# Altium PCB felxBoard.PcbDoc
Units mm, origin at the board's own origin, x right, y up, seen from the top; angles counter-clockwise.
Board outline 180 x 37.5 mm, 2 copper layers (Top Layer, Bottom Layer), stack 0.475 mm thick; 55 components, 32 nets, 176 pads, 79 vias.
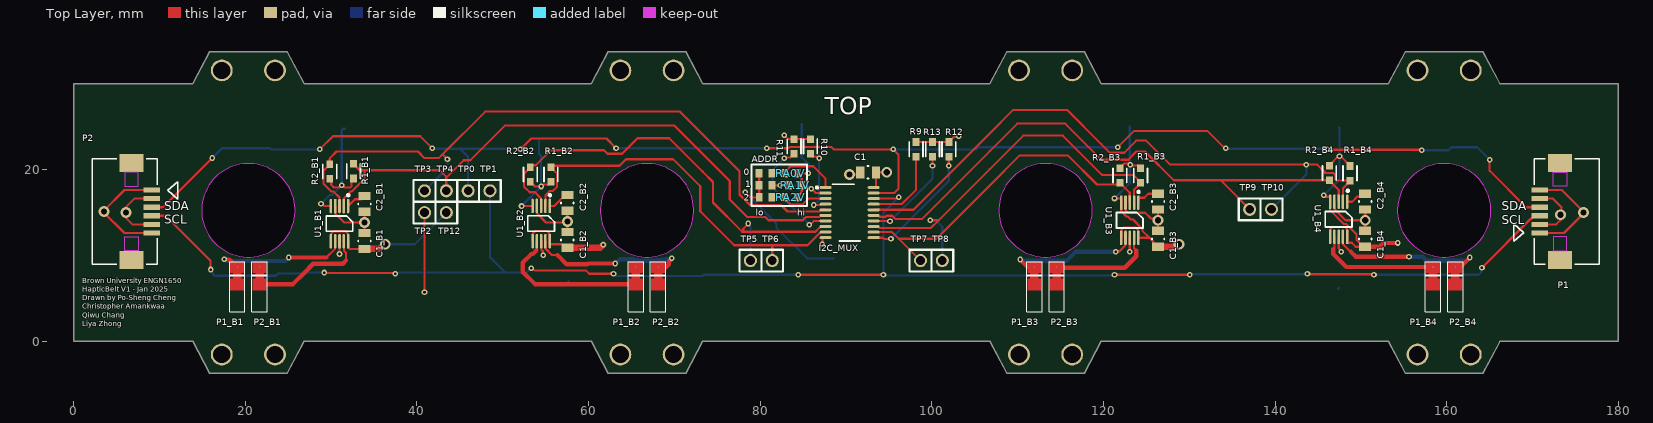
[diagram p0: Top Layer view]
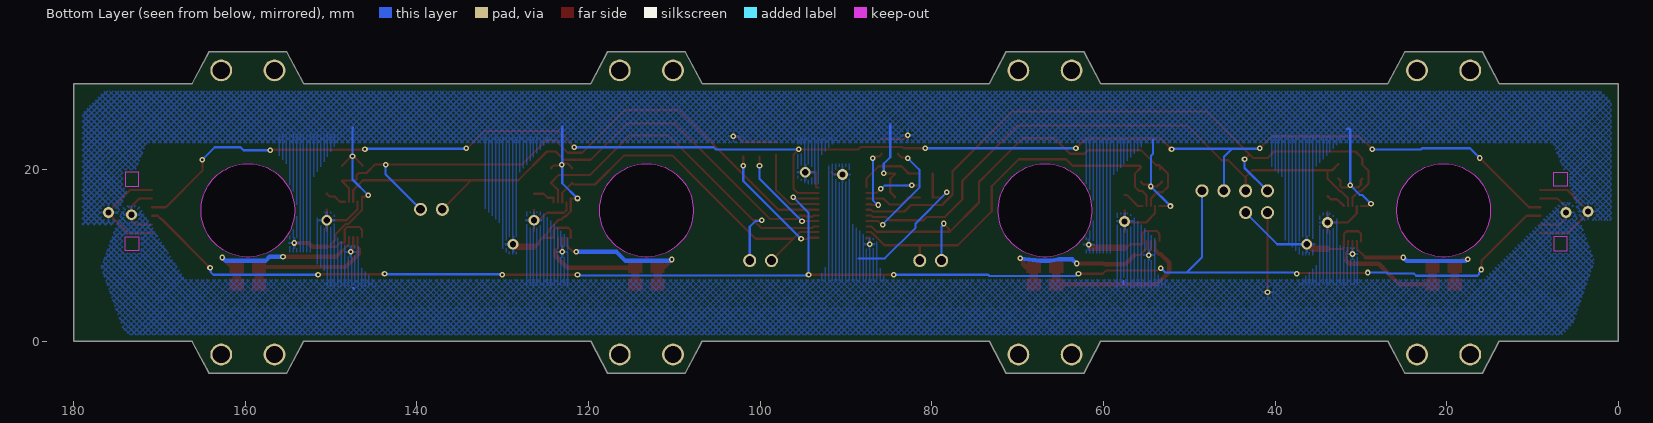
[diagram p1: Bottom Layer view, seen from below]
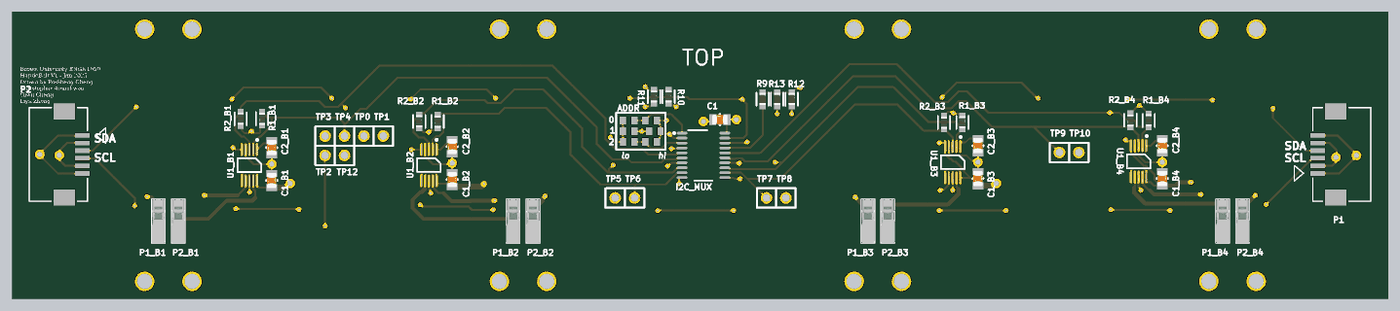
[diagram p2: 3D render of the assembled board from above, using the file's embedded part models]

## Layer stack, top to bottom
Top Solder: solder mask 0.0102, Solder Resist, Dk 3.5
Top Layer: signal copper 0.012
Dielectric 1: prepreg 0.0508, PP-001, Dk 3.9
Stiffener: core 0.4, Core-009, Dk 4.5
Bottom Layer: signal copper 0.012
Bottom Solder: solder mask 0.0102, Solder Resist, Dk 3.5

## Board outline
153.191,0 155.191,-3.748 164.191,-3.748 166.191,-0.008 180,0 180,30 166.191,30 164.191,33.752 155.191,33.752 153.191,30 119.752,30 117.752,33.752 108.752,33.752 106.752,30 73.312,30 71.312,33.752 62.312,33.752 60.312,30 26.872,30 24.872,33.752 15.872,33.752 13.872,30 0,30 0,0 13.872,0 15.872,-3.748 24.872,-3.748 26.872,0 60.312,0 62.312,-3.748 71.312,-3.748 73.312,0 106.752,0 108.752,-3.748 117.752,-3.748 119.752,0
cut-out: 109.402,11.402 ccw(c113.252,15.252) 117.102,11.402 ccw(c113.252,15.252) 117.102,19.102 ccw(c113.252,15.252) 109.402,19.102 ccw(c113.252,15.252)
cut-out: 62.962,11.402 ccw(c66.812,15.252) 70.662,11.402 ccw(c66.812,15.252) 70.662,19.102 ccw(c66.812,15.252) 62.962,19.102 ccw(c66.812,15.252)
cut-out: 16.522,11.402 ccw(c20.372,15.252) 24.222,11.402 ccw(c20.372,15.252) 24.222,19.102 ccw(c20.372,15.252) 16.522,19.102 ccw(c20.372,15.252)
cut-out: 155.841,11.402 ccw(c159.691,15.252) 163.541,11.402 ccw(c159.691,15.252) 163.541,19.102 ccw(c159.691,15.252) 155.841,19.102 ccw(c159.691,15.252)
board region P2: 13.872,0 0,0 0,30 13.872,30
board region B1: 26.872,0 24.872,-3.748 15.872,-3.748 13.872,0 13.872,30 15.872,33.752 24.872,33.752 26.872,30
board region "Flex 1": 60.312,0 26.872,0 26.872,30 60.312,30
board region B2: 73.312,0 71.312,-3.748 62.312,-3.748 60.312,0 60.312,30 62.312,33.752 71.312,33.752 73.312,30
board region "Flex 2": 106.752,0 73.312,0 73.312,30 106.752,30
board region B3: 119.752,0 117.752,-3.748 108.752,-3.748 106.752,0 106.752,30 108.752,33.752 117.752,33.752 119.752,30
board region "Flex 3": 153.191,0 119.752,0 119.752,30 153.191,30
board region B4: 166.191,-0.008 164.191,-3.748 155.191,-3.748 153.191,0 153.191,30 155.191,33.752 164.191,33.752 166.191,30
board region P1: 166.191,30 180,30 180,0 166.191,-0.008

## Design rules (kind name [scope] priority, off if disabled: settings)
Clearance [All] p1: gap=0.192 ignorepadtopadclearanceinfootprint=TRUE
DiffPairsRouting [All] p1: maxlimit=0.254 minlimit=0.254 mostfreqgap=0.254 toplayer_minwidth=0.381 toplayer_maxwidth=0.381 toplayer_prefwidth=0.381 bottomlayer_minwidth=0.381 bottomlayer_maxwidth=0.381 bottomlayer_prefwidth=0.381 substack1={4FFF1E02-C9C1-44A0-B0B1-926CD8AEF1C8} toplayer_{4fff1e02-c9c1-44a0-b0b1-926cd8aef1c8}_minwidth=0.381 toplayer_{4fff1e02-c9c1-44a0-b0b1-926cd8aef1c8}_maxwidth=0.381 toplayer_{4fff1e02-c9c1-44a0-b0b1-926cd8aef1c8}_prefwidth=0.381 bottomlayer_{4fff1e02-c9c1-44a0-b0b1-926cd8aef1c8}_minwidth=0.381 bottomlayer_{4fff1e02-c9c1-44a0-b0b1-926cd8aef1c8}_maxwidth=0.381 bottomlayer_{4fff1e02-c9c1-44a0-b0b1-926cd8aef1c8}_prefwidth=0.381 maxuncoupledlength=12.7
PolygonConnect [All] p1: connectstyle=Relief reliefconductorwidth=0.254 reliefentries=4 polygonreliefangle="90 Angle" airgapwidth=0.254
RoutingVias [All] p1: holewidth=0.711 width=1.27 viastyle="Through Hole" minholewidth=0.3 minwidth=0.6 maxholewidth=0.711 maxwidth=1.27
SolderMaskExpansion [All] p1: expansion=0.102 istentingtop=FALSE
SupplyNets "Schematic Supply Nets_3" [InNet('GND_B1')] p1: voltage=0.000
SupplyNets "Schematic Supply Nets_2" [InNet('3V3_B1')] p2: voltage=0.000
Width [All] p1: maxlimit=1.2 minlimit=0.254 preferedwidth=0.254 substack1={4FFF1E02-C9C1-44A0-B0B1-926CD8AEF1C8}
29 further rules are at their usual default settings.

## Classes and differential pairs
channel class lra_block: B1 B2 B3 B4
component class B4: C1_B4 C2_B4 DRIVER_LRA_lra_block_4 P1_B4 P2_B4 R1_B4 R2_B4 U1_B4
component class B3: C1_B3 C2_B3 DRIVER_LRA_lra_block_3 P1_B3 P2_B3 R1_B3 R2_B3 U1_B3
component class B2: C1_B2 C2_B2 DRIVER_LRA_lra_block_2 P1_B2 P2_B2 R1_B2 R2_B2 S U1_B2
component class B1: C1_B1 C2_B1 DRIVER_LRA_lra_block_1 P1_B1 P2_B1 R1_B1 R2_B1 U1_B1
component class haptic_module: 0 1 2 C1 CONN_IN CONN_OUT I2C_MUX P0 P1 P2 P3 P4 P5 P6 P7 P8 P9 P10 R9 R10 R11 R12 R13 RA0V RA1V RA2V TP0 TP1 TP2 TP3 TP4 TP5 TP6 TP7 TP8 TP9 TP10

## Components (designator, comment, footprint, x,y, rotation, side; value= is the part's Value field where it differs from the comment)
0 "0" RESC1608X55X25ML10T15 80.633,19.558 r0 top (schematic designator RA0G)
1 "0" RESC1608X55X25ML10T15 80.633,18.161 r0 top (schematic designator RA1G)
2 "0" RESC1608X55X25ML10T15 80.645,16.764 r0 top (schematic designator RA2G)
C1 "1uF" FP-CC0805-0_85-MFG 92.583,19.685 r180 top value="1 uF"
C1_B1 "1uF" FP-CC0805-0_85-MFG 33.909,11.684 r90 top value="1 uF" (schematic designator C1)
C1_B2 "1uF" FP-CC0805-0_85-MFG 57.531,11.811 r90 top value="1 uF" (schematic designator C1)
C1_B3 "1uF" FP-CC0805-0_85-MFG 126.365,11.938 r90 top value="1 uF" (schematic designator C1)
C1_B4 "1uF" FP-CC0805-0_85-MFG 150.495,11.938 r90 top value="1 uF" (schematic designator C1)
C2_B1 "1uF" FP-CC0805-0_85-MFG 33.909,16.002 r270 top value="1 uF" (schematic designator C2)
C2_B2 "1uF" FP-CC0805-0_85-MFG 57.531,16.129 r270 top value="1 uF" (schematic designator C2)
C2_B3 "1uF" FP-CC0805-0_85-MFG 126.365,16.256 r270 top value="1 uF" (schematic designator C2)
C2_B4 "1uF" FP-CC0805-0_85-MFG 150.495,16.256 r270 top value="1 uF" (schematic designator C2)
I2C_MUX "TCA9544APWR" PW0020A_L 90.424,14.986 r0 top
P1 "522070660" CON_522070660_MOL 173.99,15.113 r90 top
P1_B1 "TE2343297-2" TE2343297-2 18.172,9.252 r270 top (schematic designator P1)
P1_B2 "TE2343297-2" TE2343297-2 64.612,9.252 r270 top (schematic designator P1)
P1_B3 "TE2343297-2" TE2343297-2 111.052,9.252 r270 top (schematic designator P1)
P1_B4 "TE2343297-2" TE2343297-2 157.491,9.252 r270 top (schematic designator P1)
P2 "522070660" CON_522070660_MOL 5.969,15.113 r270 top
P2_B1 "TE2343297-2" TE2343297-2 20.772,9.252 r270 top (schematic designator P2)
P2_B2 "TE2343297-2" TE2343297-2 67.212,9.252 r270 top (schematic designator P2)
P2_B3 "TE2343297-2" TE2343297-2 113.652,9.252 r270 top (schematic designator P2)
P2_B4 "TE2343297-2" TE2343297-2 160.091,9.252 r270 top (schematic designator P2)
R1_B1 "10K" FP-RT0603-MFG 32.639,19.812 r270 top value=10KΩ (schematic designator R1)
R1_B2 "10K" FP-RT0603-MFG 55.626,19.431 r270 top value=10KΩ (schematic designator R1)
R1_B3 "10K" FP-RT0603-MFG 124.333,19.304 r90 top value=10KΩ (schematic designator R1)
R1_B4 "10K" FP-RT0603-MFG 148.717,19.558 r90 top value=10KΩ (schematic designator R1)
R2_B1 "10K" FP-RT0603-MFG 29.845,19.773 r90 top value=10KΩ (schematic designator R2)
R2_B2 "10K" FP-RT0603-MFG 53.213,19.431 r90 top value=10KΩ (schematic designator R2)
R2_B3 "10K" FP-RT0603-MFG 121.92,19.304 r270 top value=10KΩ (schematic designator R2)
R2_B4 "10K" FP-RT0603-MFG 146.323,19.599 r270 top value=10KΩ (schematic designator R2)
R9 "10K" FP-RT0603-MFG 98.171,22.352 r90 top value=10KΩ
R10 "10K" FP-RT0603-MFG 85.852,22.694 r90 top value=10KΩ
R11 "10K" FP-RT0603-MFG 83.947,22.694 r90 top value=10KΩ
R12 "10K" FP-RT0603-MFG 101.981,22.352 r90 top value=10KΩ
R13 "10K" FP-RT0603-MFG 100.076,22.352 r90 top value=10KΩ
RA0V "0" RESC1608X55X25ML10T15 83.566,19.558 r0 top
RA1V "0" RESC1608X55X25ML10T15 84.062,18.161 r0 top
RA2V "0" RESC1608X55X25ML10T15 83.566,16.764 r0 top
TP0 "pin" PCBCOMPONENT_1 45.974,17.526 r0 top
TP1 "pin" PCBCOMPONENT_1 48.514,17.526 r0 top
TP2 "pin" PCBCOMPONENT_1 40.894,14.986 r0 top
TP3 "pin" PCBCOMPONENT_1 40.894,17.526 r0 top
TP4 "pin" PCBCOMPONENT_1 43.434,17.526 r0 top
TP5 "pin" PCBCOMPONENT_1 78.867,9.398 r0 top
TP6 "pin" PCBCOMPONENT_1 81.407,9.398 r0 top
TP7 "pin" PCBCOMPONENT_1 98.679,9.398 r0 top
TP8 "pin" PCBCOMPONENT_1 101.219,9.398 r0 top
TP9 "pin" PCBCOMPONENT_1 137.033,15.367 r0 top
TP10 "pin" PCBCOMPONENT_1 139.573,15.367 r90 top
TP12 "Comment" PCBComponent_1 43.434,14.986 r0 top
U1_B1 "DRV2605LDGSR" DGS0010A 30.988,13.698 r270 top (schematic designator U1)
U1_B2 "DRV2605LDGSR" DGS0010A 54.483,13.716 r270 top (schematic designator U1)
U1_B3 "DRV2605LDGSR" DGS0010A 123.063,14.097 r270 top (schematic designator U1)
U1_B4 "DRV2605LDGSR" DGS0010A 147.4,14.205 r270 top (schematic designator U1)

## Footprints (in the part's own frame and the unit in brackets; to place one, negate y for a bottom-side part, rotate by r counter-clockwise, add the part's x,y. Pads: shape width x height; smd on the part's side, far side on the other; paste and mask are expansions set on the pad)
CON_522070660_MOL [mm]
  rect 0.6x1.9 smd paste+0 mask+0.076: 1(-2.5,3.15) 2(-1.5,3.15) 3(-0.5,3.15) 4(0.5,3.15) 5(1.5,3.15) 6(2.5,3.15)
  rect 2.1x2.8 smd paste+0 mask+0.076: P1(-5.65,0.8) P2(5.65,0.8)
  Keep-Out Layer region: 2.95,0 2.95,1.6 4.6,1.6 4.6,0
  Keep-Out Layer region: -2.95,0 -2.95,1.6 -4.6,1.6 -4.6,0
  silkscreen extent -6.15,-3.8 6.15,6.2
DGS0010A [mm]
  oval 1.7x0.3 smd paste-0.102 mask+0.051: 1(-2.05,1) 2(-2.05,0.5) 3(-2.05,0) 4(-2.05,-0.5) 5(-2.05,-1) 6(2.05,-1) 7(2.05,-0.5) 8(2.05,0) 9(2.05,0.5) 10(2.05,1)
  silkscreen extent -0.9,-1.55 0.9,1.55
FP-CC0805-0_85-MFG [mm]
  rect 0.95x1.4 smd paste+0 mask+0: 1(-0.925,0) 2(0.925,0)
  silkscreen extent -0.07,-0.73 0.07,0.73, body extent -1.6,-1.05 1.6,1.05, height 0.25
FP-RT0603-MFG [mm]
  rect 0.9x0.8 smd paste+0 mask+0: 1(-0.85,0) 2(0.85,0)
  silkscreen extent -0.85,-0.81 0.86,0.8, body extent -1.4,-0.55 1.4,0.55, height 0.25
PCBCOMPONENT_1 [mil]
  round 60 hole 40: 0(0,0)
  silkscreen extent -50,-50 50,50
PCBComponent_1 [mil]
  round 60 hole 40: 0(0,0)
  silkscreen extent -50,-50 50,50
PW0020A_L [mm]
  oval 1.4x0.35 smd paste+0 mask+0.051: 1(-2.8,2.925) 2(-2.8,2.275) 3(-2.8,1.625) 4(-2.8,0.975) 5(-2.8,0.325) 6(-2.8,-0.325) 7(-2.8,-0.975) 8(-2.8,-1.625) 9(-2.8,-2.275) 10(-2.8,-2.925) 11(2.8,-2.925) 12(2.8,-2.275) 13(2.8,-1.625) 14(2.8,-0.975) 15(2.8,-0.325) 16(2.8,0.325) 17(2.8,0.975) 18(2.8,1.625) 19(2.8,2.275) 20(2.8,2.925)
  silkscreen extent -2.02,-3.3 1.2,3.3
RESC1608X55X25ML10T15 [mm] "Chip Resistor, 2-Leads, Body 1.60x0.80mm, IPC Low Density"
  rect 0.8x1 smd: 1(-0.75,0) 2(0.75,0)
  body extent -0.85,-0.45 0.85,0.45, height 0.55
TE2343297-2 [mm]
  round 0.025 smd: 0(0.6,0.9) 0(2.6,0.9)
  Top Layer region: 0,0.1 1.3,0.1 1.3,1.7 0,1.7
  Top Layer region: 2,1.7 2,0.1 3.3,0.1 3.3,1.7
  silkscreen extent 0,0 5.8,1.8, body extent 0,0 5.75,1.8, height 3.94

## Part data
0 1 2 RA0V RA1V RA2V: library part CMP-2100-03667-1, "Chip Resistor, 0 Ohm, +/- 5%, 0.1 W, -55 to 155 degC, 0603 (1608 Metric), RoHS, Tape and Reel", Case Code (Imperial)=0603, Case Code (Metric)=1608, Manufacturer=Yageo, Max Operating Temperature=155degC, Min Operating Temperature=-55degC, Package Description="2-Pin Surface Mount Device, Body 1.6 x 0.8 mm", Package Quantity=5000, Power Rating=100mW, Resistance=0mOhm, Temperature Coefficient=200ppm/degreesC, Tolerance=5%, Voltage Rating=50V, Case/Package=0603, Composition=ThickFilm, Contact Plating=Tin, Datasheet URL=http://www.yageo.com/NewPortal/yageodocoutput?fileName=/pdf/R-Chip/PYu-RC_Group_51_RoHS_L_5.pdf, Datasheet Version="Rev. 5, 10/2016", Depth=0.8mm, Height=0.45mm, Lead Free=LeadFree, Length=1.6mm, Manufacturer URL=http://www.yageo.com/, Military Standard=Not, Number of Pins=2, Package Reference=0603, Packaging=TapeandReel, Radiation Hardening=No, REACH SVHC=NoSVHC, RoHSCompliant=true, Termination=SMD/SMT, Voltage Rating (DC)=50V, Width=0.8mm
C1 C1_B1 C1_B2 C1_B3 C1_B4 C2_B1 C2_B2 C2_B3 C2_B4: library part CMP-03422-000001-1, "CAP CER 1UF 16V X7R 0805", Capacitance="1 uF", Manufacturer=Yageo, Manufacturer Part Number=CC0805KKX7R7BB105, Package=CC0805-0.85, Temperature="-30°C to +85°C", Temperature Characteristic=X7R, Temperature Range High=+85°C, Temperature Range Low=-30°C, Tolerance=0.1, Voltage Rating="16 V", Automotive=No, Category=Cap, ComponentLink2Description=Datasheet, ComponentLink2URL=http://www.yageo.com/documents/recent/UPY-GPHC_Y5V_6.3V-to-50V_8.pdf, Device Class L1="Passive Components", Device Class L2=Capacitors, Device Class L3="Ceramic Capacitors", Digikey Description="CAP CER 1UF 16V X7R 0805", Footprint Url=http://www.yageo.com/exep/pages/download/literatures/UPY-C_GEN_24.pdf, Height=0.95mm, Ipc Land Pattern Name=CAPC200125X85, Lead Free=Yes, Material=Ceramic, Mouser Description="Multilayer Ceramic Capacitors MLCC - SMD/SMT 1.0uF 16V X7R 10%", Octopart=https://octopart.com/cc0805kkx7r7bb105-yageo-8376555, RoHS=TRUE
I2C_MUX: "No Description Available", Manufacturer="Texas Instruments", CompType=IC, Mfr_Name="Texas Instruments", MountType=SMT, PackageReference=PW0020A, PartNumber=TCA9544APWR, RefDes=RefDes, RoHS=Y, SymbolVerison=2015-05-04, TYPE=TYPE
P1 P2: "No Description Available", Mfr_Name="Molex Connector Corporation", RefDes=RefDes, TYPE=Type
R1_B1 R1_B2 R1_B3 R1_B4 R2_B1 R2_B2 R2_B3 R2_B4 R9 R10 R11 R12 R13: library part CMP-2000-04517-2, "RES SMD 10K OHM 0.1% 1/10W 0603", Manufacturer=Yageo, Manufacturer Part Number=RT0603BRE0710KL, Package=RT0603, Power Rating=0.1W, Resistance=10KΩ, Temperature="-55°C to +155°C", Temperature Coefficient="50 ppm/°C", Temperature Range High=+155°C, Temperature Range Low=-55°C, Tolerance=0.001, Voltage Rating=75V, Automotive=No, Category=Res, ComponentLink2Description=Datasheet, ComponentLink2URL=http://www.yageo.com/documents/recent/PYu-RT_1-to-0.01_RoHS_L_9.pdf, Composition="Thin Film", Device Class L1="Passive Components", Device Class L2=Resistors, Device Class L3="Chip SMD Resistors", Digikey Description="RES SMD 10K OHM 0.1% 1/10W 0603", Footprint Url=http://www.yageo.com/exep/pages/download/literatures/PYu-R_Mount_10.pdf, Height=0.55mm, Ipc Land Pattern Name=RESC16080X45, Lead Free=Yes, Mouser Description="Res Thin Film 0603 10K Ohm 0.1% 1/10W ±50ppm/°C Molded SMD SMD Paper T/R", Octopart=https://octopart.com/rt0603bre0710kl-yageo-1273959, RoHS=TRUE, Series=RT
U1_B1 U1_B2 U1_B3 U1_B4: "No Description Available", Manufacturer="Texas Instruments", PartNumber=DRV2605LDGS, CompType=IC, Mfr_Name="Texas Instruments", MountType=SMT, PackageReference=DGS0010A, RefDes=RefDes, RoHS=Y, TYPE=TYPE

## Free pads (board coordinates)
  round 2.54 hole 2: SCR1(17.272,-1.548) SCR1(17.272,31.552) SCR1(23.472,-1.548) SCR1(23.472,31.552) SCR1(63.712,-1.548) SCR1(63.712,31.552) SCR1(69.912,-1.548) SCR1(69.912,31.552) SCR1(110.152,-1.548) SCR1(110.152,31.552) SCR1(116.352,-1.548) SCR1(116.352,31.552) SCR1(156.591,-1.548) SCR1(156.591,31.552) SCR1(162.791,-1.548) SCR1(162.791,31.552)

## Via types
v1: diameter 0.66, hole 0.3, Top Layer to Bottom Layer, 67 vias
v2: diameter 1.27, hole 0.711, Top Layer to Bottom Layer, 12 vias

## Nets (pads, with @x,y where several pads share a name; then routed paths per layer and width w, separated by ;. In a path a pad name is that pad's centre, name@x,y a point inside that pad or via, vN(x,y) a via of type N, cw(c..) or ccw(c..) an arc to the next point about the centre after c; other vN are vias at no path point)
3V3_B1: C1.1 C1_B1.1 C1_B2.1 C1_B3.1 C1_B4.1 I2C_MUX.20 P1.1 P1.6 P2.1 P2.6 R1_B1.2 R1_B2.2 R1_B3.2 R1_B4.2 R2_B1.1 R2_B2.1 R2_B3.1 R2_B4.1 R9.2 R10.2 R11.2 R12.2 R13.2 RA0V.2 RA1V.2 RA2V.2 TP12.0 U1_B1.5 U1_B1.6 U1_B1.10 U1_B2.5 U1_B2.6 U1_B2.10 U1_B3.5 U1_B3.6 U1_B3.10 U1_B4.5 U1_B4.6 U1_B4.10 | length 166.2
  Top Layer w0.254: P2.6 5.929,12.613 3.534,15.008 v2(3.534,15.113) 3.534,15.218 5.929,17.613 P2.1 ; v1(28.829,16.002) 28.939,16.002 29.193,15.748 U1_B1.5 ; R2_B1.1 30.019,18.749 30.019,18.241 30.353,17.907 30.878,17.907 31.132,18.161 v1(31.242,18.161) 31.352,18.161 31.606,17.907 32.254,17.907 32.403,18.056 32.403,18.726 R1_B1.2 ; U1_B1.6 29.997,11.657 29.997,12.52 30.294,12.817 31.682,12.817 31.979,12.52 31.979,11.657 U1_B1.10 31.997,11.639 31.997,10.922 32.16,10.759 C1_B1.1 ; v1(52.197,15.748) 53.465,15.748 U1_B2.5 ; R2_B2.1 53.213,18.531 53.486,18.258 53.536,18.258 53.76,18.034 v1(54.483,18.034) 54.593,18.034 54.817,18.258 55.353,18.258 55.626,18.531 R1_B2.2 ; U1_B2.6 53.483,12.378 53.514,12.409 53.514,12.56 53.789,12.835 55.177,12.835 55.452,12.56 55.452,12.409 55.483,12.378 55.483,11.321 55.504,11.3 56.892,11.3 57.306,10.886 C1_B2.1 ; v1(82.804,24.003) 83.263,23.544 R11.2 R10.2 ; RA2V.2 84.316,16.864 84.836,17.384 84.836,18.137 RA1V.2 84.836,18.185 84.836,18.938 84.316,19.458 RA0V.2 v1(85.598,19.558) ; I2C_MUX.20 93.464,17.911 93.508,17.955 C1.1 v2(94.742,19.685) ; R9.2@97.977,23.202 R9.2 R13.2 R12.2 101.981,23.252 102.254,23.525 102.304,23.525 102.577,23.798 103.046,23.798 v1(103.124,23.876) ; v1(121.285,16.637) 122.042,16.637 122.063,16.616 U1_B3.5 122.072,16.138 122.072,15.144 122.684,14.532 122.815,14.532 123.173,14.173 123.431,14.173 124.532,13.072 124.532,12.875 125.36,12.047 U1_B3.10 124.054,12.056 124.054,12.919 123.757,13.216 122.369,13.216 122.072,12.919 122.072,12.056 U1_B3.6 ; R2_B3.1 121.92,20.204 122.417,20.701 v1@123.124,20.701 ; v1(123.124,20.551) v1@123.124,20.701 ; R1_B3.2 124.333,20.204 124.06,20.477 123.312,20.477 123.173,20.616 123.173,20.701 v1@123.124,20.701 ; 125.357,12.047 125.792,11.612 125.792,11.361 125.912,11.241 C1_B3.1@126.163,11.241 ; C1_B3.1@126.14,11.238 C1_B3.1 ; v1(145.669,17.018) 145.859,16.828 146.379,16.828 146.4,16.807 U1_B4.5 146.409,16.246 146.409,15.252 148.01,13.651 148.274,13.651 149.476,12.449 149.476,11.807 C1_B4.1@150.27,11.013 ; R2_B4.1 146.323,20.499 147.369,21.545 v1(147.5,21.545) 147.63,21.545 148.717,20.458 R1_B4.2 ; U1_B4.6 146.409,12.164 146.409,13.027 146.706,13.324 148.094,13.324 148.391,13.027 148.391,12.164 U1_B4.10 148.4,11.491 148.421,11.47 148.931,11.47 149.388,11.013 C1_B4.1@150.27,11.013 ; C1_B4.1 C1_B4.1@150.27,11.013 ; P1.1 173.649,12.613 175.917,14.881 v2(175.917,14.986) 175.917,15.091 173.395,17.613 P1.6
  Top Layer w0.5: C1_B4.1 152.192,11.013 152.631,11.452 v1(154.291,11.452)
  Top Layer w0.75: C1_B1.1 35.642,10.759 36.186,11.303 v2(36.322,11.303) ; C1_B2.1 61.346,10.886 v1(61.712,11.252) ; C1_B3.1@126.391,10.987 126.417,11.013 128.347,11.013 128.637,11.303 v2(128.778,11.303)
  Bottom Layer w0.254: v1(28.829,16.002) 29.881,17.054 30.135,17.054 v1(31.242,18.161) 31.242,24.616 31.391,24.765 31.623,24.765 ; v2(36.322,11.303) 39.751,11.303 TP12.0 ; v1@52.324,15.748 v1(52.197,15.748) v1(54.483,18.034) 54.483,21.59 54.229,21.844 54.229,23.495 ; 84.836,25.273 84.836,21.434 85.598,20.672 v1(85.598,19.558) ; v1(121.285,16.637) 123.063,18.415 123.063,20.49 v1(123.124,20.551) ; v1@123.063,20.551 123.063,25.019 ; v1(145.669,17.018) 147.5,18.849 v1(147.5,21.545) 147.5,24.839 147.447,24.892
ADDR0: 0.2 I2C_MUX.1 RA0V.1 | length 8.3
  Top Layer w0.254: 0.2 RA0V.1 82.816,19.658 83.535,20.377 86.176,20.377 87.624,18.929 I2C_MUX.1
ADDR1: 1.2 I2C_MUX.2 RA1V.1 | length 7.8
  Top Layer w0.254: 1.2 v1(82.35,18.161) RA1V.1 ; v1(85.965,17.78) 85.969,17.78 86.47,17.279 87.606,17.279 I2C_MUX.2
  Bottom Layer w0.254: v1@82.1,18.161 v1(82.35,18.161) 85.474,18.161 85.855,17.78 v1(85.965,17.78)
ADDR2: 2.2 I2C_MUX.3 RA2V.1 | length 6.9
  Top Layer w0.254: 2.2 RA2V.1 82.816,16.664 83.535,15.945 84.971,15.945 85.637,16.611 I2C_MUX.3
GND_B1: 0.1 1.1 2.1 C1.2 C1_B1.2 C1_B2.2 C1_B3.2 C1_B4.2 C2_B1.2 C2_B2.2 C2_B3.2 C2_B4.2 I2C_MUX.10 P1.2 P1.5 P2.2 P2.5 TP2.0 U1_B1.4 U1_B1.8 U1_B2.4 U1_B2.8 U1_B3.4 U1_B3.8 U1_B4.4 U1_B4.8 | length 82.2
  Top Layer w0.254: P2.5 6.856,13.613 6.096,14.373 v2(6.096,14.997) 6.096,15.621 7.088,16.613 P2.2 ; U1_B1.4 30.497,15.739 30.497,14.876 31.53,13.843 v2(33.909,13.843) ; v1(30.988,10.16) U1_B1.8 ; C1_B1.2 v2(33.909,13.843) ; C2_B1.2 v2(33.909,13.843) ; v1(40.894,5.715) TP2.0 ; U1_B2.4 53.992,15.757 53.992,14.894 55.043,13.843 v2@57.531,13.843 ; U1_B2.8 54.492,11.657 54.492,10.854 54.514,10.832 54.514,10.641 54.659,10.496 54.659,10.111 v1(54.737,10.033) ; C1_B2.2 v2@57.531,13.843 ; C2_B2.2 v2@57.531,13.843 ; v1(78.246,17.367) 78.849,16.764 2.1 79.895,18.149 1.1 0.1 ; v1(87.249,11.303) 87.249,12.017 87.293,12.061 I2C_MUX.10 ; v2(90.424,19.431) 91.404,19.431 C1.2 ; U1_B3.4 122.572,16.138 122.572,15.275 122.869,14.978 124.849,14.978 125.536,14.291 126.171,14.291 v2(126.365,14.097) ; v1(123.053,10.414) 123.058,10.419 123.058,12.042 U1_B3.8 ; C1_B3.2 v2(126.365,14.097) ; C2_B3.2 v2(126.365,14.097) ; U1_B4.4 146.909,16.246 146.909,15.383 148.195,14.097 v2(150.495,14.097) ; U1_B4.8 147.4,10.825 147.701,10.524 v1(147.701,10.414) ; C1_B4.2 v2(150.495,14.097) ; C2_B4.2 v2(150.495,14.097) ; P1.2 172.744,13.613 173.355,14.224 173.355,15.621 172.363,16.613 P1.5
  Bottom Layer w0.254: 57.658,6.702 57.658,6.985 ; v1(78.246,17.367) 81.886,13.727 81.886,13.237 85.471,9.652 88.519,9.652 ; v2@126.218,13.95 v2(126.365,14.097) ; 147.32,6.096 147.423,6.199
  other v2: 57.531,13.97 173.228,14.732
INT_0: I2C_MUX.4 R10.1 | length 8.5
  Top Layer w0.254: R10.1 85.852,21.794 86.125,21.521 86.573,21.521 86.758,21.336 v1(86.868,21.336) ; v1(86.233,15.875) 86.987,15.875 87.073,15.961 I2C_MUX.4
  Bottom Layer w0.254: v1(86.233,15.875) 86.318,15.875 86.868,16.425 v1(86.868,21.336)
INT_1: I2C_MUX.7 R11.1 | length 13.5
  Top Layer w0.254: v1(82.804,21.336) 82.88,21.412 83.515,21.412 83.624,21.521 83.674,21.521 83.947,21.794 R11.1 ; v1(85.725,13.589) 85.835,13.589 86.239,13.993 87.606,13.993 I2C_MUX.7
  Bottom Layer w0.254: v1(82.804,21.336) 81.45,19.982 81.45,17.892 85.725,13.617 v1(85.725,13.589)
INT_2: I2C_MUX.11 R12.1 | length 14.4
  Top Layer w0.254: I2C_MUX.11 94.357,12.061 94.495,11.923 v1(95.235,11.923) ; v1(101.981,20.447) R12.1
  Bottom Layer w0.254: v1(95.235,11.923) 101.981,18.669 v1(101.981,20.447)
INT_3: I2C_MUX.14 R13.1 | length 11.5
  Top Layer w0.254: I2C_MUX.14 93.242,13.993 95.1,13.993 v1(95.123,13.97) ; v1(100.076,20.447) R13.1
  Bottom Layer w0.254: v1(95.123,13.97) 100.076,18.923 v1(100.076,20.447)
INT_MASTER: I2C_MUX.17 R9.1 | length 9.8
  Top Layer w0.254: I2C_MUX.17 93.242,15.979 96.497,15.979 98.171,17.653 R9.1@98.171,21.767
NetP1_B1_0: P1_B1.0 U1_B1.7 | length 18.3
  Top Layer w0.254: 29.455,9.752 30.479,10.776 30.479,11.639 U1_B1.7
  Top Layer w0.5: v1(17.572,9.552) 17.603,9.521 18.133,9.521 19.002,8.652 ; v1(25.072,9.752) 26.872,9.752 29.455,9.752
  Top Layer w1: P1_B1.0@19.072,6.652 P1_B1.0@19.072,8.652
  Bottom Layer w0.5: v1(17.572,9.552) 17.615,9.552 17.815,9.352 24.672,9.352 v1(25.072,9.752)
NetP1_B2_0: P1_B2.0 U1_B2.7 | length 20.1
  Top Layer w0.254: 53.945,10.596 53.974,10.625 53.974,11.657 U1_B2.7
  Top Layer w0.5: 53.945,10.596 53.945,10.591 53.514,10.16 53.34,10.16 52.324,9.144 52.324,8.099 53.771,6.652 60.312,6.652 P1_B2.0@65.512,6.652
  Top Layer w1: P1_B2.0@65.512,6.652 P1_B2.0@65.512,8.652
NetP1_B3_0: P1_B3.0 U1_B3.7 | length 18
  Top Layer w0.254: 111.152,8.652 P1_B3.0@111.952,8.652 ; v1(121.412,10.414) 121.49,10.492 121.871,10.492 122.554,11.175 122.554,12.038 U1_B3.7
  Top Layer w0.5: v1(110.284,9.52) 111.152,8.652
  Top Layer w1: P1_B3.0@111.952,6.652 P1_B3.0@111.952,8.652
  Bottom Layer w0.5: v1(110.284,9.52) 110.327,9.52 110.482,9.365 115.69,9.365 116.738,10.414 v1(121.412,10.414)
NetP1_B4_0: P1_B4.0 U1_B4.7 | length 16.3
  Top Layer w0.254: 146.774,10.738 146.9,10.864 U1_B4.7
  Top Layer w0.5: 146.774,10.738 146.774,10.169 148.291,8.652 P1_B4.0@158.391,8.652
  Top Layer w1: P1_B4.0@158.391,6.652 P1_B4.0@158.391,8.652
NetP2_B1_0: P2_B1.0 U1_B1.9 | length 15.6
  Top Layer w0.254: U1_B1.9 31.497,11.639 31.497,10.569 31.75,10.316 31.75,9.398
  Top Layer w0.5: P2_B1.0@21.672,6.652 25.572,6.652 26.872,7.952 27.937,9.017 31.369,9.017 31.75,9.398
  Top Layer w1: P2_B1.0@21.672,6.652 P2_B1.0@21.672,8.652
NetP2_B2_0: P2_B2.0 U1_B2.9 | length 20.9
  Top Layer w0.254: U1_B2.9 54.992,11.657 54.992,10.794 55.753,10.033 56.388,10.033 ; 59.868,8.955 59.965,9.052 ; P2_B2.0@68.112,8.652 68.857,8.652 68.957,8.552
  Top Layer w0.5: 56.388,10.033 57.466,8.955 59.868,8.955 ; 59.965,9.052 60.312,9.052 v1(63.112,9.052) ; 68.957,8.552 69.354,8.949 69.354,9.251 69.712,9.609 v1(69.712,9.652)
  Top Layer w1: P2_B2.0@68.112,6.652 P2_B2.0@68.112,8.652
  Bottom Layer w0.5: v1(63.112,9.052) 63.155,9.052 63.655,9.552 65.184,9.552 65.689,9.459 66.272,9.365 67.352,9.365 v1(69.712,9.652)
NetP2_B3_0: P2_B3.0 U1_B3.9 | length 14.1
  Top Layer w0.254: U1_B3.9 123.572,12.038 123.572,10.823 123.825,10.57
  Top Layer w0.5: P2_B3.0@114.552,8.652 114.652,8.552 119.752,8.552 122.471,8.552 123.825,9.906 123.825,10.57
  Top Layer w1: P2_B3.0@114.552,6.652 P2_B3.0@114.552,8.652
NetP2_B4_0: P2_B4.0 U1_B4.9 | length 20.8
  Top Layer w0.254: U1_B4.9 147.909,12.146 147.909,11.283 148.778,10.414 148.844,10.414 ; P2_B4.0@160.991,8.652 161.591,8.652
  Top Layer w0.5: 148.844,10.414 149.406,9.852 153.191,9.852 v1(155.591,9.852) ; 161.591,8.652 v1(162.691,9.752)
  Top Layer w1: P2_B4.0@160.991,6.652 P2_B4.0@160.991,8.652
  Bottom Layer w0.5: v1(155.591,9.852) 157.159,9.852 157.646,9.365 162.261,9.365 162.648,9.752 v1(162.691,9.752)
REG_B1: C2_B1.1 U1_B1.1 | length 2.4
  Top Layer w0.254: U1_B1.1 32.786,16.546 33.528,16.546 C2_B1.1
REG_B2: C2_B2.1 U1_B2.1 | length 2.6
  Top Layer w0.254: U1_B2.1 56.018,15.766 57.306,17.054 C2_B2.1
REG_B3: C2_B3.1 U1_B3.1 | length 3.1
  Top Layer w0.254: U1_B3.1 124.063,16.699 124.084,16.72 124.767,16.72 125.228,17.181 C2_B3.1
REG_B4: C2_B4.1 U1_B4.1 | length 2.5
  Top Layer w0.254: U1_B4.1 148.97,16.255 149.593,16.878 150.192,16.878 C2_B4.1
SCL: I2C_MUX.18 P1.3 P2.4 TP1.0 | length 192.5
  Top Layer w0.254: P2.4 10.711,14.613 15.972,9.352 v1(15.972,8.352) ; v1(29.21,8.001) 29.273,7.938 37.401,7.938 v1(37.465,7.874) ; v1(53.34,8.509) 53.438,8.509 53.692,8.255 59.677,8.255 60.08,7.852 v1(62.912,7.852) ; v1(84.455,7.747) v1(94.361,7.747) ; I2C_MUX.18 v1@96.113,16.611 ; v1(121.285,7.747) v1(130.048,7.747) ; v1(143.764,7.874) 143.827,7.81 151.447,7.81 v1(151.511,7.747) ; v1(164.091,8.552) 164.091,8.565 169.758,14.232 169.809,14.232 170.19,14.613 P1.3
  Bottom Layer w0.254: v1(15.972,8.352) 15.972,8.242 16.246,7.968 16.246,7.8 16.425,7.62 23.567,7.62 23.821,7.874 26.872,7.874 26.999,8.001 v1(29.21,8.001) ; v1(37.465,7.874) 37.543,7.952 37.768,7.952 37.817,8.001 50.292,8.001 ; TP1.0 48.514,9.779 50.292,8.001 ; v1(53.34,8.509) 53.298,8.509 52.79,8.001 50.292,8.001 ; v1(62.912,7.852) 63,7.852 63.264,7.588 71.547,7.588 73.31,7.62 73.312,7.62 73.314,7.62 73.441,7.747 v1(84.455,7.747) ; v1(96.139,16.764) 94.361,14.986 v1(94.361,7.747) 94.439,7.669 94.696,7.669 94.713,7.652 121.08,7.652 121.175,7.747 v1(121.285,7.747) ; v1(130.048,7.747) 130.112,7.81 143.701,7.81 v1(143.764,7.874) ; v1(151.511,7.747) 163.711,7.747 164.013,8.05 164.013,8.474 v1(164.091,8.552)
SCL1: I2C_MUX.6 R1_B1.1 TP4.0 U1_B1.2 | length 72.1
  Top Layer w0.254: U1_B1.2 31.497,15.757 31.497,16.62 32.338,17.461 32.439,17.461 33.909,18.931 33.909,19.918 ; 33.358,19.893 32.639,20.612 R1_B1.1 33.383,19.918 33.909,19.918 ; TP4.0 43.434,19.05 ; I2C_MUX.6 87.073,14.661 86.89,14.478 85.344,14.478 84.963,14.097 80.968,14.097 80.587,14.478 78.486,14.478 76.454,16.51 76.454,18.669 69.971,25.152 60.312,25.152 50.298,25.152 46.228,21.082 45.466,21.082 43.434,19.05 ; 33.909,19.918 42.671,19.918 43.434,19.155 43.434,19.05
SCL2: I2C_MUX.9 R1_B2.1 TP6.0 U1_B2.2 | length 46.5
  Top Layer w0.254: U1_B2.2 54.983,16.997 55.484,17.498 55.844,17.498 56.345,17.999 56.345,19.512 R1_B2.1@55.626,20.231 ; R1_B2.1 55.626,20.331 55.742,20.447 60.312,20.447 63.607,20.447 64.369,21.209 69.855,21.209 73.012,18.052 73.012,15.126 76.962,11.176 81.407,11.176 ; TP6.0@81.407,9.123 TP6.0 81.407,11.176 ; I2C_MUX.9 87.073,12.711 86.917,12.555 86.894,12.555 85.515,11.176 81.407,11.176
SCL3: I2C_MUX.13 R1_B3.1 TP8.0 U1_B3.2 | length 47.5
  Top Layer w0.254: I2C_MUX.13 93.775,13.361 93.928,13.208 99.908,13.208 100.797,14.097 ; v1(99.822,14.097) 100.797,14.097 ; U1_B3.2 123.563,17.634 124.333,18.404 124.333,18.504 123.452,19.385 119.819,19.385 119.752,19.452 115.252,23.952 110.652,23.952 106.752,20.052 100.797,14.097
  Bottom Layer w0.254: v1(99.822,14.097) 99.898,14.021 100.533,14.021 101.219,13.335 TP8.0@101.219,9.089
SCL4: I2C_MUX.16 R1_B4.1 TP10.0 U1_B4.2 | length 75.3
  Top Layer w0.254: I2C_MUX.16 97.861,15.311 106.752,24.202 109.502,26.952 115.752,26.952 119.752,22.952 120.747,21.957 122.414,21.957 123.825,23.368 124.968,23.368 127.762,20.574 v1(143.637,20.574) 144.897,20.574 145.872,19.599 146.774,19.599 147.042,19.331 147.042,18.857 147.191,18.708 R1_B4.1 148.717,18.658 147.9,17.841 U1_B4.2
  Bottom Layer w0.254: TP10.0@139.293,15.087 143.637,19.431 v1(143.637,20.574)
SDA: I2C_MUX.19 P1.4 P2.3 TP0.0 | length 185.8
  Top Layer w0.254: P2.3 10.433,15.613 v1(16.172,21.352) ; v1(28.702,22.352) 30.226,23.876 40.386,23.876 v1(41.783,22.479) ; v1(52.07,22.352) 53.34,23.622 60.312,23.622 62.091,23.622 v1(63.212,22.501) ; v1(80.772,22.479) 83.281,22.479 83.415,22.613 88.316,22.613 88.577,22.352 v1(95.504,22.352) 96.1,21.756 96.1,17.741 95.638,17.279 93.242,17.279 I2C_MUX.19 ; v1(121.666,22.606) 123.571,24.511 132.097,24.511 134.129,22.479 v1(134.239,22.479) ; v1(146.05,22.352) 146.1,22.302 157.041,22.302 v1(157.091,22.252) ; v1(164.991,21.152) 164.991,19.852 169.226,15.617 170.836,15.617 P1.4
  Bottom Layer w0.254: v1(16.172,21.352) 17.299,22.479 22.882,22.479 23.009,22.352 26.872,22.352 v1(28.702,22.352) ; v1(41.783,22.479) 41.846,22.415 45.021,22.415 ; TP0.0 45.974,21.463 45.021,22.415 ; v1(52.07,22.352) 52.006,22.415 45.021,22.415 ; v1(63.212,22.501) 63.223,22.49 73.312,22.49 80.761,22.49 v1(80.772,22.479) ; v1(95.504,22.352) 105.181,22.352 105.435,22.606 v1(121.666,22.606) ; v1(134.239,22.479) 134.302,22.415 145.877,22.415 v1@145.94,22.352 ; v1(157.091,22.252) 160.192,22.252 160.546,22.606 163.537,22.606 v1(164.991,21.152)
SDA1: I2C_MUX.5 R2_B1.2 TP3.0 U1_B1.3 | length 79.5
  Top Layer w0.254: U1_B1.3 30.979,15.757 30.979,16.751 30.269,17.461 30.006,17.461 29.126,18.341 29.126,19.854 29.845,20.573 R2_B1.2 29.845,21.308 30.635,22.098 40.132,22.098 40.894,21.336 42.545,21.336 42.989,21.78 ; v1(43.561,21.209) 42.989,21.78 ; I2C_MUX.5 87.073,15.311 86.875,15.113 83.185,15.113 82.423,15.875 78.82,15.875 77.597,17.098 77.597,19.812 70.657,26.752 60.312,26.752 47.961,26.752 42.989,21.78
  Bottom Layer w0.254: TP3.0 43.561,20.193 v1(43.561,21.209)
SDA2: I2C_MUX.8 R2_B2.2 TP5.0 U1_B2.3 | length 54.1
  Top Layer w0.254: R2_B2.2 53.213,20.231 52.494,19.512 52.494,17.999 53.145,17.348 53.765,17.348 54.474,16.638 54.474,15.775 U1_B2.3 ; R2_B2.2@53.397,20.047 53.397,20.406 53.486,20.494 53.845,20.494 55.603,22.252 60.312,22.252 61.812,22.252 62.212,21.852 63.912,21.852 65.712,23.652 69.412,23.652 73.312,19.752 74.512,18.552 74.512,16.166 77.913,12.765 78.167,12.765 ; v1(78.613,13.716) 78.02,13.123 78.02,12.912 78.167,12.765 ; I2C_MUX.8 87.073,13.361 86.917,13.205 86.894,13.205 86.454,12.765 78.167,12.765
  Bottom Layer w0.254: v1(78.613,13.716) 78.613,13.606 78.867,13.352 TP5.0
SDA3: I2C_MUX.12 R2_B3.2 TP7.0 U1_B3.3 | length 41.4
  Top Layer w0.254: I2C_MUX.12 95.366,12.711 95.454,12.623 96.139,11.938 ; TP7.0@99.006,9.071 96.139,11.938 ; U1_B3.3 123.063,17.311 122.243,18.131 122.193,18.131 121.92,18.404 R2_B3.2 121.718,18.252 119.752,18.252 119.252,18.252 115.852,21.652 110.252,21.652 106.752,18.152 100.538,11.938 96.139,11.938
SDA4: I2C_MUX.15 R2_B4.2 TP9.0 U1_B4.3 | length 69.9
  Top Layer w0.254: I2C_MUX.15 93.775,14.661 93.931,14.505 94.604,14.505 94.719,14.619 95.392,14.619 95.787,14.224 98.824,14.224 106.752,22.152 109.952,25.352 115.552,25.352 119.752,21.152 122.879,21.152 123.825,22.098 124.841,22.098 128.19,18.749 133.651,18.749 ; TP9.0@137.484,14.916 133.651,18.749 ; U1_B4.3 147.4,17.622 146.323,18.699 R2_B4.2 133.651,18.749
pads on no net: P1.P1 P1.P2 P2.P1 P2.P2

## Polygon pours and split planes (outlines as drawn)
GND_B1 on Bottom Layer "GND_B1_L02_P002" (hatched Vertical grid 0.4 track 0.15, pour order 2): 85.344,6.985 86.233,9.017 86.233,11.43 86.868,12.065 87.63,12.065 89.408,13.843 89.408,20.701 91.694,20.701 92.202,20.32 92.202,9.017 93.345,6.985
3V3_B1 on Bottom Layer "3V3_B1_L02_P006" (hatched Vertical grid 0.4 track 0.15, pour order 6): 128.016,19.685 128.016,10.16 129.413,10.16 130.175,10.922 130.175,13.589 132.08,15.494 132.08,23.749 124.333,23.749
3V3_B1 on Bottom Layer " " (hatched 45Degree grid 0.47 track 0.2, pour order 1): 5.842,18.669 7.643,23.127 171.505,23.127 175.387,13.589 178.943,13.589 178.943,26.543 176.359,29.127 2.076,29.127 0.873,27.924 0.873,14.127 4.358,14.127
GND_B1 on Bottom Layer "GND_B1_L02_P009" (hatched Vertical grid 0.4 track 0.15, pour order 9): 52.07,6.223 53.975,8.128 53.975,11.938 57.023,14.986 58.547,14.986 58.547,6.223
3V3_B1 on Bottom Layer "3V3_B1_L02_P012" (hatched Vertical grid 0.4 track 0.15, pour order 12): 40.767,24.003 40.767,20.701 39.116,19.05 39.116,12.065 37.084,10.033 35.306,10.033 35.306,20.32 31.75,23.876
GND_B1 on Bottom Layer "GND_B1_L02_P011" (hatched Vertical grid 0.4 track 0.15, pour order 11): 30.099,6.604 30.099,10.287 30.734,10.922 32.131,10.922 32.766,11.557 32.766,14.224 33.528,14.986 34.544,14.986 34.925,14.478 34.925,9.144 37.465,6.604
GND_B1 on Bottom Layer "GND_B1_L02_P007" (hatched Vertical grid 0.4 track 0.15, pour order 7): 144.272,6.35 146.558,8.636 146.558,10.795 146.939,11.176 148.336,11.176 149.225,12.065 149.225,14.351 149.987,15.113 150.876,15.113 151.638,14.351 151.638,9.017 150.749,8.128 150.749,6.35
GND_B1 on Bottom Layer "GND_B1_L02_P005" (hatched Vertical grid 0.4 track 0.15, pour order 5): 122.174,6.477 122.174,11.811 125.476,15.113 127.508,15.113 127.508,6.477
3V3_B1 on Bottom Layer "3V3_B1_L02_P010" (hatched Vertical grid 0.4 track 0.15, pour order 10): 62.412,23.552 62.412,20.552 62.412,10.252 59.012,10.252 58.912,10.152 58.912,19.32 55.372,22.86 55.372,23.495
GND_B1 on Bottom Layer "GND_B1_L02_P000" (hatched 45Degree grid 0.47 track 0.2, pour order 0): 167.03,7.127 172.418,15.748 174.15,15.748 176.784,8.636 174.244,1.524 173.482,0.762 6.604,0.762 5.334,2.032 2.833,9.291 5.265,16.129 6.731,16.129 15.733,7.127
3V3_B1 on Bottom Layer "3V3_B1_L02_P008" (hatched Vertical grid 0.4 track 0.15, pour order 8): 152.091,19.049 152.091,10.652 152.391,10.352 154.976,10.352 154.976,20.372 156.391,22.052 156.391,24.152 148.606,24.152
3V3_B1 on Bottom Layer "3V3_B1_L02_P003" (hatched Vertical grid 0.4 track 0.15, pour order 3): 90.932,23.622 92.964,21.59 92.964,18.288 94.556,18.288 95.758,19.09 95.758,23.622

## Silkscreen, mask and mechanical layers (free items; w line width, h text height)
Top Overlay:
  circle w0.254: c32.004,17.018 r0.127
  circle w0.254: c55.499,17.018 r0.127
  circle w0.254: c86.614,17.907 r0.127
  circle w0.254: c148.463,17.526 r0.127
  circle w0.254: c124.079,17.399 r0.127
  lines w0.254: 78.994,15.748 85.471,15.748 85.471,20.574 78.994,20.574 78.994,15.748
  text "TOP" at 87.503,26.416 h2
  text "ADDR" at 78.994,20.828 h0.75
  text "SDA" at 10.541,15.24 h1
  text "SDA" at 166.391,15.252 h1
  text "lo" at 79.502,14.605 h0.75
  text "hi" at 84.328,14.605 h0.75
  text "SCL" at 10.541,13.716 h1
  text "SCL" at 166.391,13.652 h1
  text "Brown University ENGN1650 / HapticBelt V1 - Jan 2025 / Drawn by Po-Sheng Cheng / Christopher Amankwaa / Qiwu Chang / Liya Zhong" at 1.016,1.524 h1
Mechanical 1:
  lines w0.254: 0,0 180,0 180,30 0,30 0,0
Board Shape:
  lines w0.2: 13.872,0 13.872,30 ; 13.872,0 15.872,-3.748 24.872,-3.748 26.872,0 ; 13.872,0 0,0 0,30 13.872,30 ; 13.872,30 15.872,33.752 24.872,33.752 26.872,30 ; 26.872,0 26.872,30 ; 26.872,0 60.312,0 ; 26.872,30 60.312,30 ; 60.312,0 60.312,30 ; 60.312,0 62.312,-3.748 71.312,-3.748 73.312,0 ; 60.312,30 62.312,33.752 71.312,33.752 73.312,30 ; 73.312,0 73.312,30 ; 73.312,0 106.752,0 ; 73.312,30 106.752,30 ; 106.752,0 106.752,30 ; 106.752,0 108.752,-3.748 117.752,-3.748 119.752,0 ; 106.752,30 108.752,33.752 117.752,33.752 119.752,30 ; 119.752,0 119.752,30 ; 119.752,0 153.191,0 ; 119.752,30 153.191,30 ; 153.191,0 153.191,30 ; 153.191,0 155.191,-3.748 164.191,-3.748 166.191,-0.008 ; 153.191,30 155.191,33.752 164.191,33.752 166.191,30 ; 166.191,-0.008 166.191,30 ; 166.191,-0.008 180,0 180,30 166.191,30 ; 16.522,11.402 cw(c20.372,15.252) 16.522,19.102 cw(c20.372,15.252) 24.222,19.102 cw(c20.372,15.252) 24.222,11.402 cw(c20.372,15.252) 16.522,11.402 ; 62.962,11.402 cw(c66.812,15.252) 62.962,19.102 cw(c66.812,15.252) 70.662,19.102 cw(c66.812,15.252) 70.662,11.402 cw(c66.812,15.252) 62.962,11.402 ; 109.402,11.402 cw(c113.252,15.252) 109.402,19.102 cw(c113.252,15.252) 117.102,19.102 cw(c113.252,15.252) 117.102,11.402 cw(c113.252,15.252) 109.402,11.402 ; 155.841,11.402 cw(c159.691,15.252) 155.841,19.102 cw(c159.691,15.252) 163.541,19.102 cw(c159.691,15.252) 163.541,11.402 cw(c159.691,15.252) 155.841,11.402
  text "HAPTIC BELT // HAPTIC MODULE // PO-SHENG CHENG" at -0.135,49.903 h3
Stiffener:
  lines w0.2: 13.872,0 13.872,30 ; 13.872,0 15.872,-3.748 24.872,-3.748 26.872,0 ; 13.872,0 0,0 0,30 13.872,30 ; 13.872,30 15.872,33.752 24.872,33.752 26.872,30 ; 26.872,0 26.872,30 ; 26.872,0 60.312,0 ; 26.872,30 60.312,30 ; 60.312,0 60.312,30 ; 60.312,0 62.312,-3.748 71.312,-3.748 73.312,0 ; 60.312,30 62.312,33.752 71.312,33.752 73.312,30 ; 73.312,0 73.312,30 ; 73.312,0 106.752,0 ; 73.312,30 106.752,30 ; 106.752,0 106.752,30 ; 106.752,0 108.752,-3.748 117.752,-3.748 119.752,0 ; 106.752,30 108.752,33.752 117.752,33.752 119.752,30 ; 119.752,0 119.752,30 ; 119.752,0 153.191,0 ; 119.752,30 153.191,30 ; 153.191,0 153.191,30 ; 153.191,0 155.191,-3.748 164.191,-3.748 166.191,-0.008 ; 153.191,30 155.191,33.752 164.191,33.752 166.191,30 ; 166.191,-0.008 166.191,30 ; 166.191,-0.008 180,0 180,30 166.191,30 ; 16.522,11.402 cw(c20.372,15.252) 16.522,19.102 cw(c20.372,15.252) 24.222,19.102 cw(c20.372,15.252) 24.222,11.402 cw(c20.372,15.252) 16.522,11.402 ; 62.962,11.402 cw(c66.812,15.252) 62.962,19.102 cw(c66.812,15.252) 70.662,19.102 cw(c66.812,15.252) 70.662,11.402 cw(c66.812,15.252) 62.962,11.402 ; 109.402,11.402 cw(c113.252,15.252) 109.402,19.102 cw(c113.252,15.252) 117.102,19.102 cw(c113.252,15.252) 117.102,11.402 cw(c113.252,15.252) 109.402,11.402 ; 155.841,11.402 cw(c159.691,15.252) 155.841,19.102 cw(c159.691,15.252) 163.541,19.102 cw(c159.691,15.252) 163.541,11.402 cw(c159.691,15.252) 155.841,11.402
  text "HAPTIC BELT // HAPTIC MODULE // PO-SHENG CHENG" at -0.174,49.935 h3
  text "STIFFENER FR4 0.4MM" at 158.845,30.998 h1.75 r270
  text "STIFFENER FR4 0.4MM" at 19.226,30.898 h1.75 r270
  text "STIFFENER FR4 0.4MM" at 65.866,30.898 h1.75 r270
  text "STIFFENER FR4 0.4MM" at 112.306,30.498 h1.75 r270
Top Title:
  text "HAPTIC BELT // HAPTIC MODULE // PO-SHENG CHENG // LAYER 1" at -0.135,50.03 h3
Bottom Title:
  text "HAPTIC BELT // HAPTIC MODULE // PO-SHENG CHENG // LAYER 2" at -0.135,49.903 h3

## Dimensions
166.191,-0.008 to 180,0 on Board Dimension
26.872,0 to 60.312,0 on Board Dimension
13.872,0 to 0,0 on Board Dimension
20.372,15.252 to 13.872,30 on Board Dimension
20.372,15.252 to 27.462,22.342 on Board Dimension
0,30 to 180,30 on Board Dimension
26.872,0 to 13.872,0 on Board Dimension
26.872,30 to 27.872,33.752 on Board Dimension
15.872,-4.748 to 24.872,-4.748 on Board Dimension
15.872,-3.748 to 15.872,33.752 on Board Dimension
0,0 to 0,30 on Board Dimension